# Altium PCB PCB1.pcbdoc
Units mil, origin at the board's own origin, x right, y up, seen from the top; angles counter-clockwise.
Board outline 3654 x 1712 mil, 2 copper layers (Top Layer, Bottom Layer), stack 62.206 mil thick; 11 components, 5 nets, 26 pads, 36 vias.
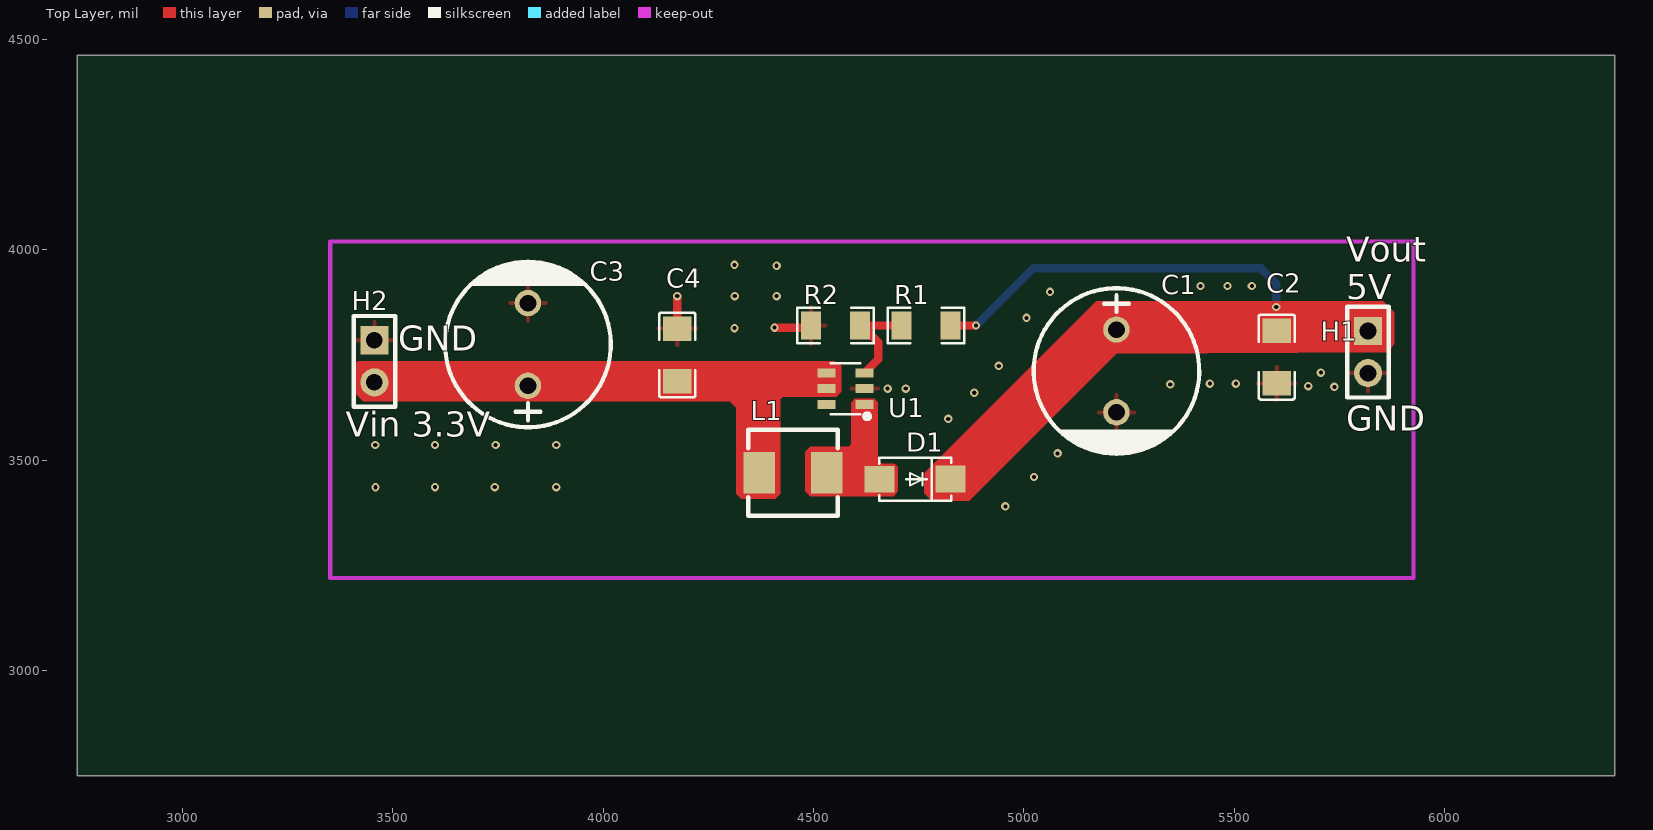
[diagram p0: Top Layer view]
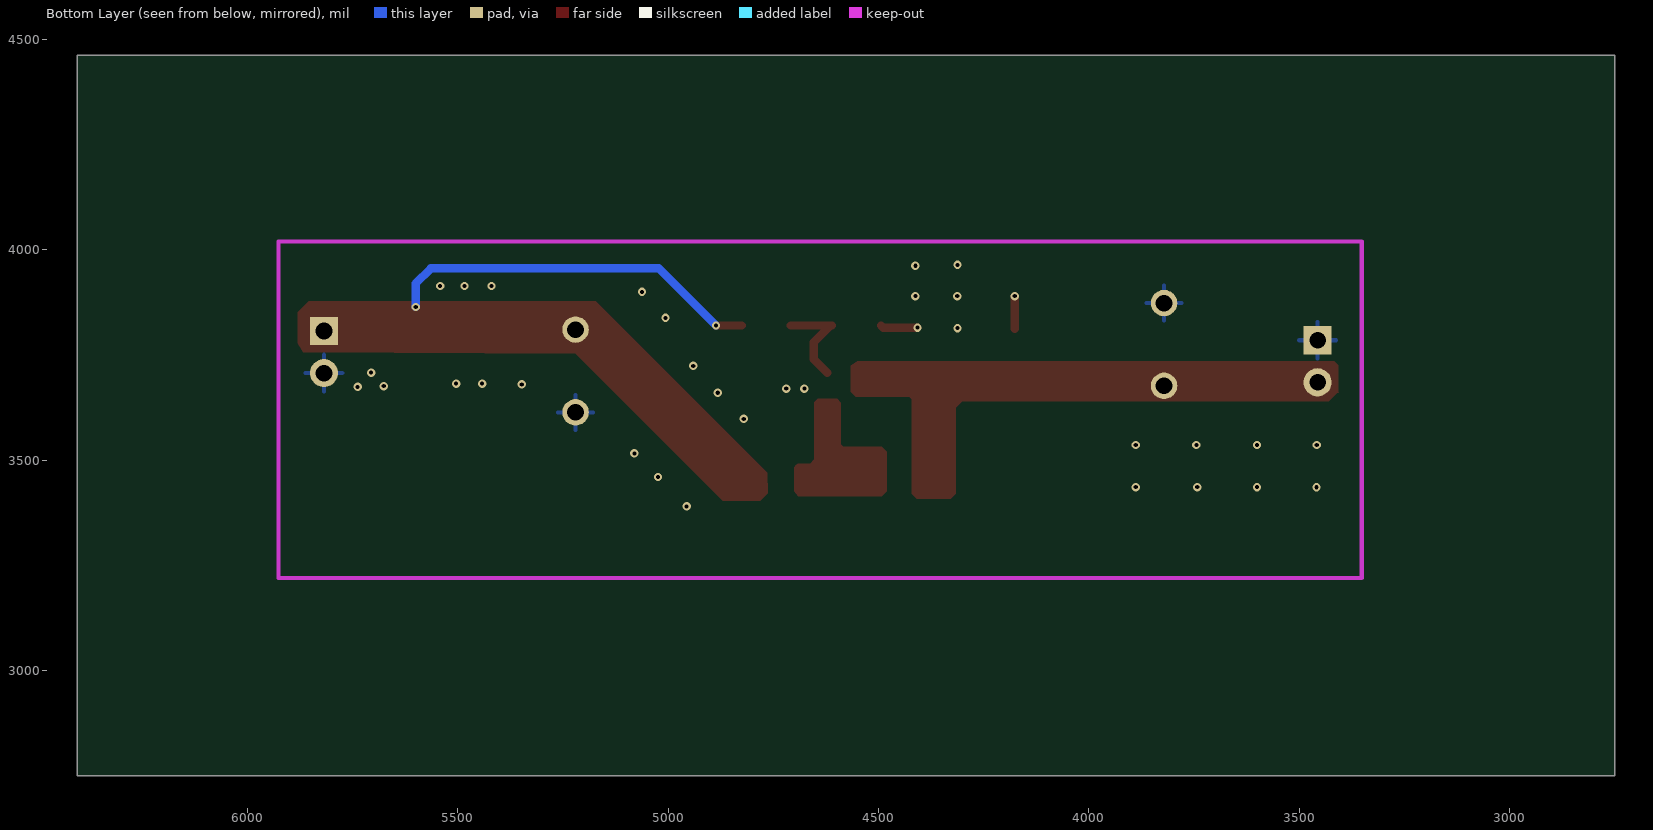
[diagram p1: Bottom Layer view, seen from below]

## Layer stack, top to bottom
Top Solder Mask Layer: solder mask 0.394, Dk 3.3
Top Layer: signal copper 1.379
Dielectric1: surface 59.449, FR4, Dk 4.5
Bottom Layer: signal copper 1.378
Bottom Solder Mask Layer: solder mask 0.394, Dk 3.3

## Board outline
6404,2750 2750,2750 2750,4462 6404,4462

## Design rules (kind name [scope] priority, off if disabled: settings)
BoardOutlineClearance copperThickness1oz [All] p0: genericclearance=10 ignorepadtopadclearanceinfootprint=FALSE except(0: Arc-SplitContinuation Track-SplitContinuation SMDPad-SplitContinuation THPad-SplitContinuation Via-SplitContinuation Fill-SplitContinuation Poly-SplitContinuation Region-SplitContinuation Text-SplitContinuation)
BoardOutlineClearance copperThickness2oz [All] p0: genericclearance=10 ignorepadtopadclearanceinfootprint=FALSE except(0: Arc-SplitContinuation Track-SplitContinuation SMDPad-SplitContinuation THPad-SplitContinuation Via-SplitContinuation Fill-SplitContinuation Poly-SplitContinuation Region-SplitContinuation Text-SplitContinuation)
BoardOutlineClearance otherClearance [All] p0: genericclearance=10 ignorepadtopadclearanceinfootprint=FALSE except(0: Arc-SplitContinuation Track-SplitContinuation SMDPad-SplitContinuation THPad-SplitContinuation Via-SplitContinuation Fill-SplitContinuation Poly-SplitContinuation Region-SplitContinuation Text-SplitContinuation)
Clearance copperThickness1oz [All] p1: gap=7 ignorepadtopadclearanceinfootprint=FALSE
Clearance copperThickness2oz [All] p1: gap=7 ignorepadtopadclearanceinfootprint=FALSE
Clearance otherClearance [All] p1: gap=7 ignorepadtopadclearanceinfootprint=FALSE
DiffPairsRouting differentialPair [All] p1: maxuncoupledlength=10 minlimit=6 maxlimit=Infinity mostfreqgap=6 toplayer_minwidth=5 toplayer_prefwidth=10 toplayer_maxwidth=100 bottomlayer_minwidth=5 bottomlayer_prefwidth=10 bottomlayer_maxwidth=100
PasteMaskExpansion pasteMaskExpansion [All] p1: expansion=0
PlaneConnect innerPlane [All] p1: planeconnectstyle=Relief reliefexpansion=20 reliefentries=4 reliefconductorwidth=10 reliefairgap=10
PolygonConnect copperRegion [All] p1: connectstyle=Relief reliefentries=4 reliefconductorwidth=10 polygonreliefangle="90 Angle" airgapwidth=10
RoutingVias viaSize [All] p1: viastyle="Through Hole" holewidth=10 minholewidth=10 maxholewidth=248.0314 width=10 minwidth=10 maxwidth=248.0314
SolderMaskExpansion solderMaskExpansion [IsVia] p1: useseparateexpansions=TRUE expansion=-1000 expansionbottom=-1000
SolderMaskExpansion solderMaskExpansion [All] p2: useseparateexpansions=TRUE expansion=2 expansionbottom=2
Width copperThickness1oz [All] p1: maxlimit=Infinity minlimit=0 preferedwidth=0
Width copperThickness2oz [All] p1: maxlimit=100 minlimit=8 preferedwidth=10

## Components (designator, comment, footprint, x,y, rotation, side; value= is the part's Value field where it differs from the comment)
C1 "22uF" CAP-TH_BD10.0-P5.00-D0.6-FD-H20 5219.99,3711.99 r270 top
C2 "100nF" C1206 5601,3745 r90 top
C3 "22uF" CAP-TH_BD10.0-P5.00-D0.6-FD-H20 3821,3775 r90 top
C4 "100nF" C1206 4176,3750 r270 top
D1 "SS54" SMA_L4.3-W2.6-LS5.0-FD 4741,3455 r0 top
H1 "" HDR-TH_2P-P2.54-V-F 5818,3757 r270 top
H2 "" HDR-TH_2P-P2.54-V-F 3456,3735 r270 top
L1 "4.7uH" IND-SMD_L5.4-W5.2_FXL0530 4451,3470 r0 top locked
R1 "10K" R1206 4767,3820 r0 top
R2 "10K" R1206 4552,3820 r0 top
U1 "MT3608" SOT-23-6_L2.9-W1.6-P0.95-LS2.8-BL 4576,3670 r90 top

## Footprints (in the part's own frame and the unit in brackets; to place one, negate y for a bottom-side part, rotate by r counter-clockwise, add the part's x,y. Pads: shape width x height; smd on the part's side, far side on the other; paste and mask are expansions set on the pad)
C1206 [mm]
  rect 1.485x1.728 smd paste-100 mask+0.051: 1(-1.593,0) 2(1.593,0)
  silkscreen extent -2.56,-1.09 2.56,1.09
CAP-TH_BD10.0-P5.00-D0.6-FD-H20 [mm]
  round 1.6 hole 1 paste+0 mask+0.05: 1(-2.5,0) 2(2.5,0)
  silkscreen extent -5,-5 5.08,5
HDR-TH_2P-P2.54-V-F [mm]
  rect 1.7x1.7 hole 1: 1(-1.27,0)
  round 1.7 hole 1: 2(1.27,0)
  silkscreen extent -2.74,-1.25 2.74,1.25
IND-SMD_L5.4-W5.2_FXL0530 [mm]
  rect 1.9x2.5 smd: 1(-2.05,0) 2(2.05,0)
  silkscreen extent -2.7,-2.6 2.7,2.6
R1206 [mil]
  rect 47.54x66.97 smd paste-3937.01 mask+2: 1(-58.22,0) 2(58.22,0)
  silkscreen extent -91,-42 91,42
SMA_L4.3-W2.6-LS5.0-FD [mm]
  rect 1.8x1.62 smd: 1(-2.15,-0.009) 2(2.15,0.009)
  silkscreen extent -2.17,-1.32 2.19,1.29
SOT-23-6_L2.9-W1.6-P0.95-LS2.8-BL [mil]
  rect 20.95x42.2 smd: 1(-37.4,-45.24) 2(0,-45.24) 3(37.4,-45.24) 4(37.4,45.24) 5(0,45.24) 6(-37.4,45.24)
  silkscreen extent -72,-57 61,35

## Via types
v1: diameter 20, hole 10, Top Layer to Bottom Layer, 36 vias

## Nets (pads, with @x,y where several pads share a name; then routed paths per layer and width w, separated by ;. In a path a pad name is that pad's centre, name@x,y a point inside that pad or via, vN(x,y) a via of type N, cw(c..) or ccw(c..) an arc to the next point about the centre after c; other vN are vias at no path point)
$1N5: R1.1 R2.2 U1.3 | length 241.3
  Top Layer w20: R2.2 R2.2@4614,3820 ; U1.3 4654,3740.16 4654,3780 R2.2@4614,3820 ; R1.1 R2.2@4614,3820
$1N9: D1.1 L1.2 U1.1
+3.3V: C3.1 C4.2 H2.2 L1.1 U1.4 U1.5
+5V: C1.1 C2.2 D1.2 H1.1 R1.2 | length 902
  Top Layer w20: R1.2 v1(4886,3820)
  Bottom Layer w20: v1(4886,3820) 5022,3956 5564,3956 5600,3920 v1(5600,3864)
GND: C1.2 C2.1 C3.2 C4.1 H1.2 H2.1 R2.1 U1.2 | length 166.2
  Top Layer w20: C4.1 v1(4176,3890) ; v1(4407,3815) 4488.78,3815 R2.1
  other v1: 4956,3390 3458.46,3435.53 3600,3436 3742,3436 3888,3436 5024,3460 5080,3516 3458,3536 3600,3536 3744,3536 3888,3536 4820,3598 4882,3660 4676,3670 4719.13,3670 5738,3674 5676,3676 5348,3680 5442,3682 5504,3682 5706,3708 4940,3724 4312,3814 5006,3838 4312.65,3890 4412,3890 5062,3900 5419.82,3914 5483.98,3914 5542,3914 4412,3962 4312,3964
pads on no net: U1.6

## Polygon pours and split planes (outlines as drawn)
GND on Bottom Layer (solid, remove dead copper, pour order 2): 3000,4212 3000,3000 6154,3000 6154,4212
GND on Top Layer (solid, remove dead copper, pour order 0): 3328,4070 3328,3052 6092,3052 6092,4070

## Keep-outs
Board Outline Layer:
  lines w10: 3351,3220 3351,4020 ; 3351,3220 5926,3220 ; 3351,3220 3351,4020 ; 3351,3220 5926,3220 ; 3351,4020 5926,4020 ; 3351,4020 5926,4020 ; 5926,3220 5926,4020 ; 5926,3220 5926,4020

## Other copper
Top Layer:
  region net +3.3V: 3416,3735 4550.32,3735 4566,3724.22 4566,3663.05 4553.58,3650.64 4426.64,3650.64 4421,3645 4421,3420 4408.7,3407.7 4328.3,3407.7 4316,3420 4316,3625 4301,3640 3429.3,3640 3409.3,3660 3406,3660 3406.79,3660.79 3406.79,3725.79
  region net $1N9: 4590,3636 4597.82,3646 4644,3646 4652,3638 4652,3502 4662,3492 4692,3492 4696,3488 4700,3483.65 4700,3426 4690,3414 4492,3414 4480,3426 4480,3520 4492,3532 4584,3532 4590,3538
  region net +5V: 4764.06,3470.06 5172,3878 5853.89,3878 5880.17,3851.72 5880,3778 5867,3756.57 5219.64,3753.03 4870.07,3403.47 4780.65,3403.47 4763.25,3420.86

## Silkscreen, mask and mechanical layers (free items; w line width, h text height)
Top Silkscreen Layer:
  text "Vout / 5V" at 5766,3882 h60
  text "GND" at 3512,3760 h60
  text "GND" at 5766,3570 h60
  text "Vin 3.3V" at 3388,3556 h60